# Altium PCB switch_control_two.PcbDoc
Units mil, origin at the board's own origin, x right, y up, seen from the top; angles counter-clockwise.
Board outline 4855 x 2900 mil, 2 copper layers (Top Layer, Bottom Layer); 15 components, 10 nets, 38 pads, 0 vias.
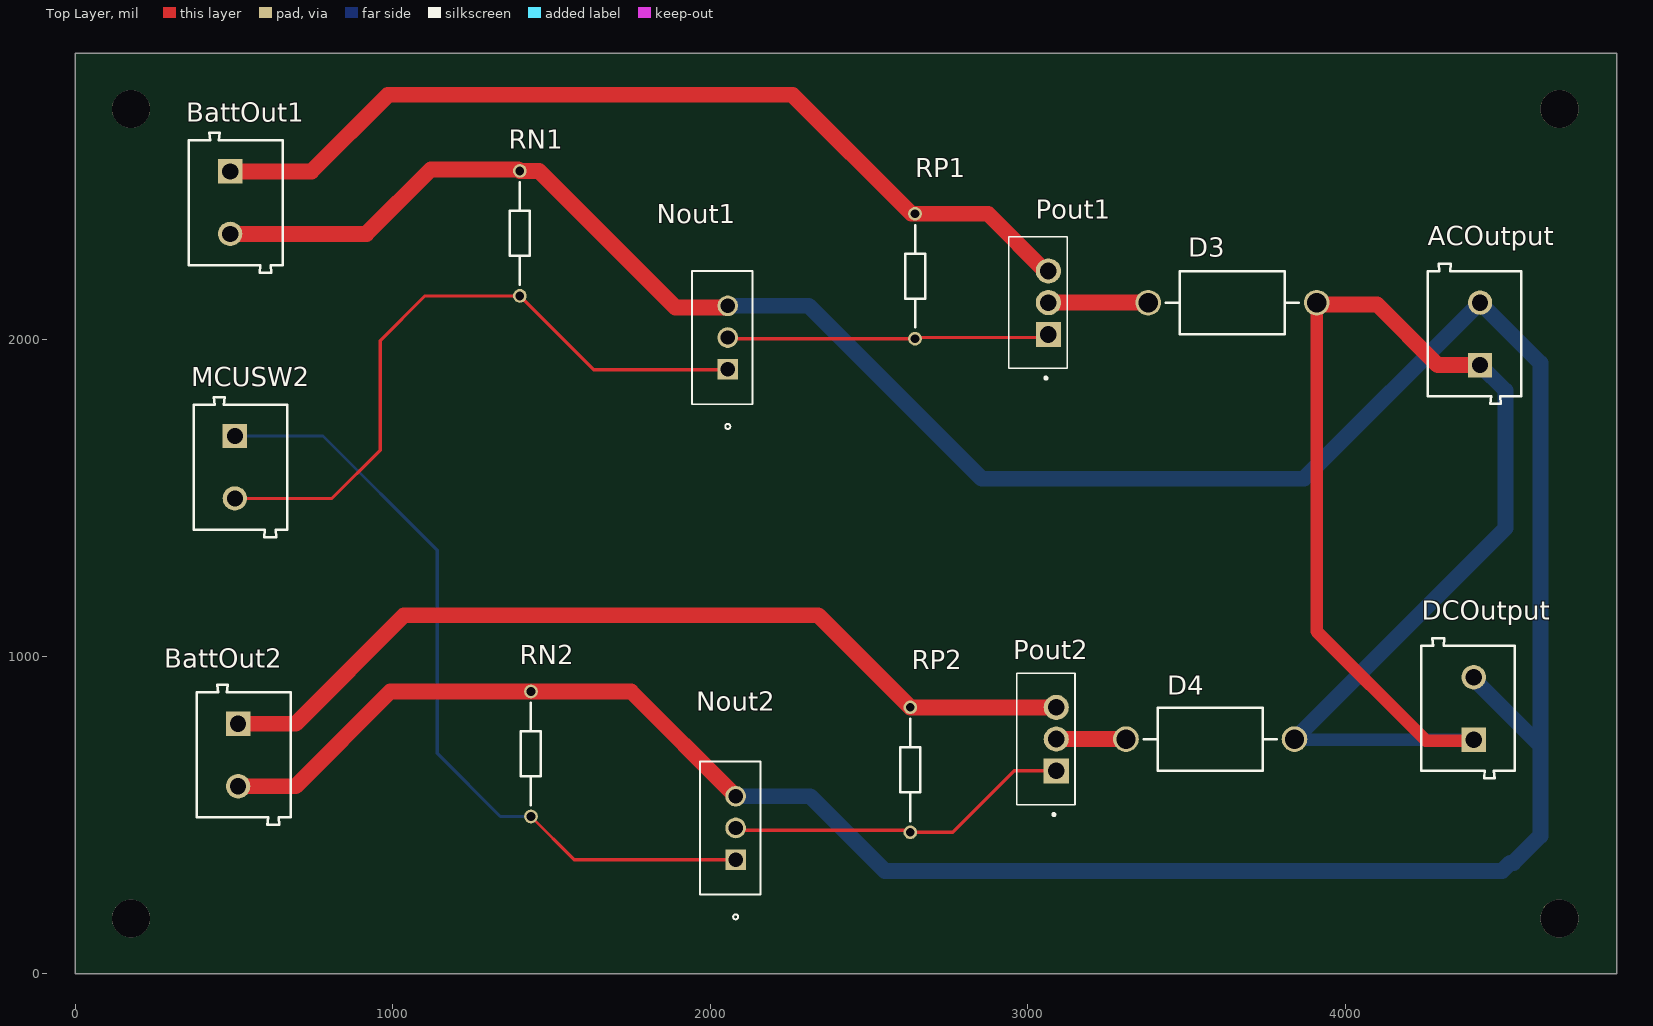
[diagram p0: Top Layer view]
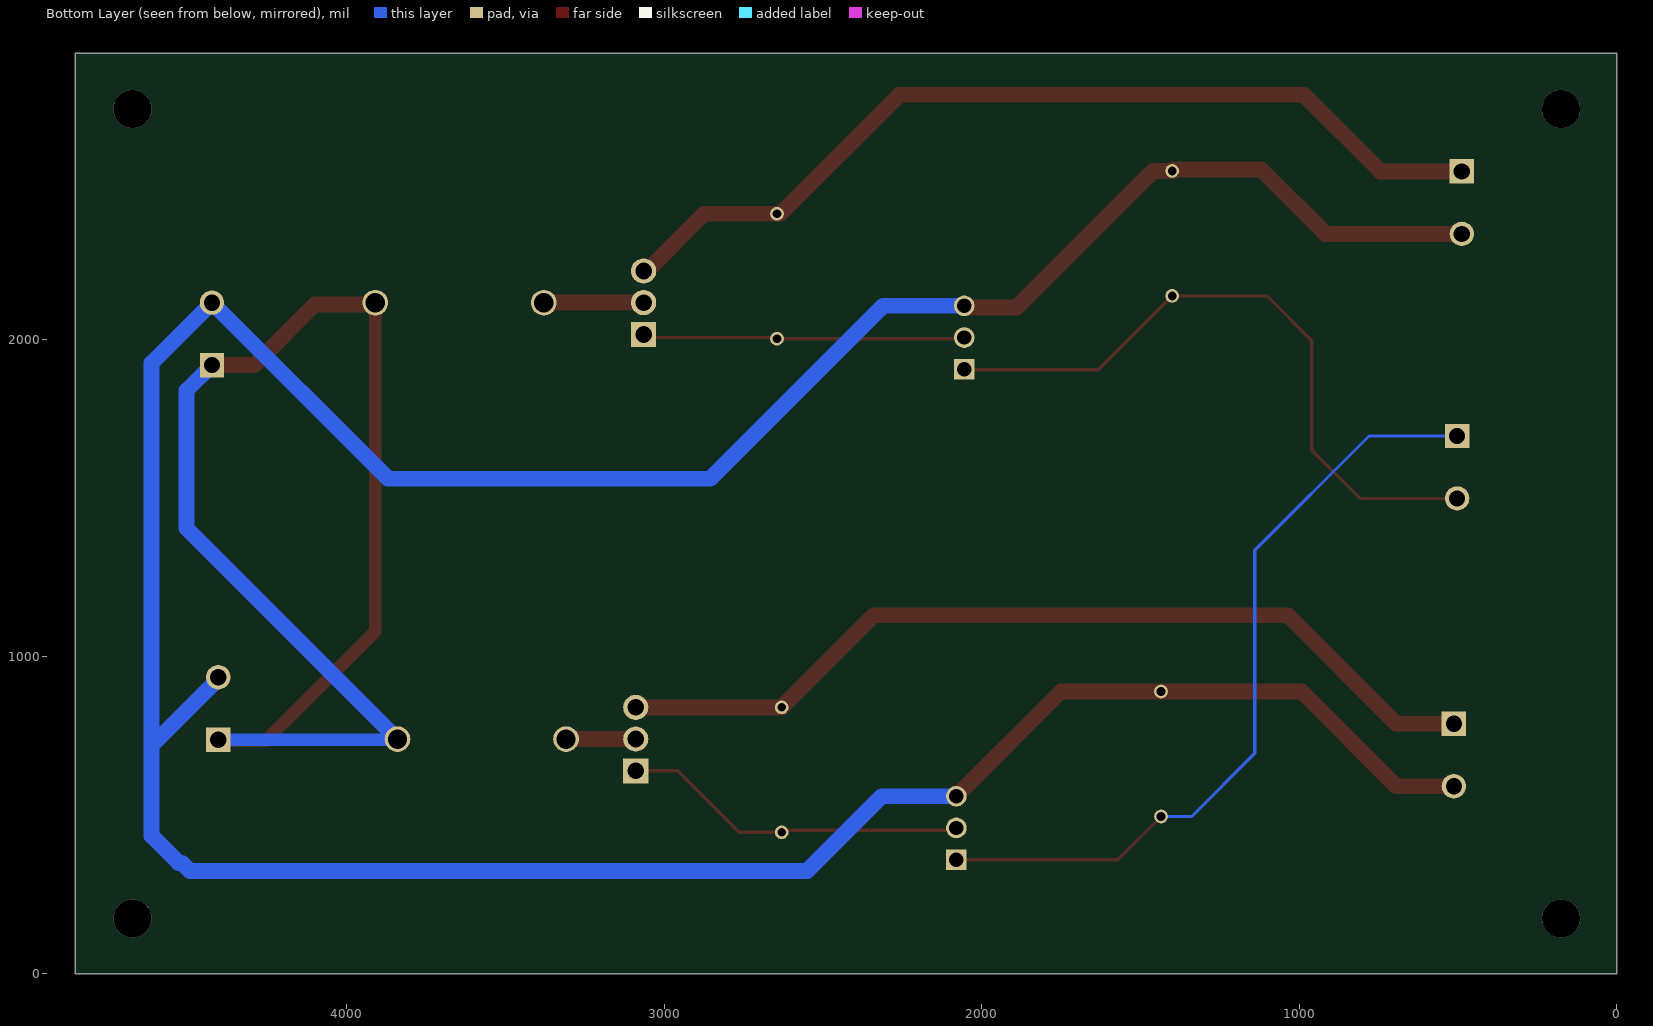
[diagram p1: Bottom Layer view, seen from below]

## Layer stack, top to bottom
Top Solder: solder mask 0.4, Solder Resist, Dk 3.5
Top Layer: signal copper 1.4
Dielectric 1: dielectric 12.6, FR-4, Dk 4.8
Bottom Layer: signal copper 1.4
Bottom Solder: solder mask 0.4, Solder Resist, Dk 3.5

## Board outline
0,0 0,2900 4855,2900 4855,0

## Design rules (kind name [scope] priority, off if disabled: settings)
Clearance [All] p1: gap=10 ignorepadtopadclearanceinfootprint=FALSE except(0: Arc-Hole Track-Hole SMDPad-Hole THPad-Hole Via-Hole Fill-Hole Poly-Hole Region-Hole Text-Hole)
HoleSize [All] p1: absolutevalues=TRUE maxlimit=130 minlimit=1 maxpercent=80.000 minpercent=20.000
PolygonConnect [All] p1: connectstyle=Relief reliefconductorwidth=10 reliefentries=4 polygonreliefangle="90 Angle" airgapwidth=10
RoutingVias [All] p1: holewidth=28 width=50 viastyle="Through Hole" minholewidth=28 minwidth=50 maxholewidth=28 maxwidth=50
SilkToSolderMaskClearance [IsPad] p1: minsilkscreentomaskgap=8 clearancetoexposedcopper=TRUE
SolderMaskExpansion [All] p1: expansion=4 istentingtop=FALSE
Width [All] p1: maxlimit=60 minlimit=10 preferedwidth=50
28 further rules are at their usual default settings.

## Components (designator, comment, footprint, x,y, rotation, side; value= is the part's Value field where it differs from the comment)
ACOutput "691102710002" 691102710002 4407.28,2016.57 r90 top
BattOut1 "691102710002" 691102710002 505,2430 r270 top
BattOut2 "691102710002" 691102710002 530,690 r270 top
D3 "1N5401" ONSC-AXIAL_LEAD-2-267-05_V 3645,2115 r180 top
D4 "1N5401" ONSC-AXIAL_LEAD-2-267-05_V 3575,740 r180 top
DCOutput "691102710002" 691102710002 4387.28,836.57 r90 top
MCUSW2 "691102710002" 691102710002 520,1596.57 r270 top
Nout1 "STP36NF06L" TO-220_STM 2055,1905 r90 top
Nout2 "STP36NF06L" TO-220_STM 2080,360 r90 top
Pout1 "IRF9540" TO254P1052X465X1989-3 3065,2015 r90 top
Pout2 "IRF9540" TO254P1052X465X1989-3 3090,640 r90 top
RN1 "MBA02040Z0000ZC100" RESAD1000W50L360D160 1400,2530 r270 top
RN2 "MBA02040Z0000ZC100" RESAD1000W50L360D160 1435,890 r270 top
RP1 "MBA02040Z0000ZC100" RESAD1000W50L360D160 2645,2395 r270 top
RP2 "MBA02040Z0000ZC100" RESAD1000W50L360D160 2630,840 r270 top

## Footprints (in the part's own frame and the unit in brackets; to place one, negate y for a bottom-side part, rotate by r counter-clockwise, add the part's x,y. Pads: shape width x height; smd on the part's side, far side on the other; paste and mask are expansions set on the pad)
691102710002 [mm] "5,00mm - modular - blue - Horizontal entry with pressure clamp - 9,9 mm height - 02p"
  rect 1.95x1.95 hole 1.3: 1(-2.5,-0.45)
  round 1.95 hole 1.3: 2(2.5,-0.45)
  silkscreen extent -5.6,-3.75 5.6,3.75, body extent -5.6,-3.75 5.6,3.75, height 9.96
ONSC-AXIAL_LEAD-2-267-05_V [mm] "AXIAL, 2-Leads, Diameter 5.05mm"
  round 2.05 hole 1.55: 1(-6.745,0) 2(6.745,0)
  silkscreen extent -5.32,-2.52 5.32,2.52
RESAD1000W50L360D160 [mm]
  round 1.1 hole 0.7: 1(0,0) 2(10,0)
  silkscreen extent 0.9,-0.8 9.1,0.8
TO254P1052X465X1989-3 [mm]
  rect 2.01x2.01 hole 1.34: 1(0,0)
  round 2.01 hole 1.34: 2(2.54,0) 3(5.08,0)
  silkscreen extent -3.6,-1.5 7.8,3.16
TO-220_STM [mil]
  rect 65x65 hole 45: 1(0,0)
  round 65 hole 45: 2(100,0) 3(200,0)
  silkscreen extent -188,-78 310,113, body extent -105,-74 305,108, height 776

## Part data
ACOutput BattOut1 BattOut2 DCOutput MCUSW2: library part CMP-1502-03258-1, "Series 102 - 5.00 mm Horizontal Entry Modular with Pressure Clamp WR-TBL, 2 pin", Manufacturer="Wurth Elektronik", Operating Temperature=-40to105degC, Datasheet URL=http://katalog.we-online.de/em/datasheet/6911027100xx.pdf, Manufacturer URL=http://www.we-online.de, Mounting Technology=THT, Package Reference=691102710002, Packaging=Box, Part Number=691102710002, Pin Number=2, Pitch=5.00mm, Publisher=WurthElektronik
D3 D4: library part CMP-0902-00078-1, "Standard Recovery Rectifier, 2-Pin Axial_Lead, Pb-Free, Bulk Box", Manufacturer="On Semiconductor", ComponentLink1Description="Manufacturer URL", ComponentLink1URL=http://www.onsemi.com/, ComponentLink2Description=Datasheet, ComponentLink2URL=http://www.onsemi.com/pub_link/Collateral/1N5400-D.PDF, ComponentLink3Description="Package Specification", ComponentLink3URL=http://www.onsemi.com/pub_link/Collateral/267-05.PDF, DatasheetVersion="Rev. 10", IFSM Max (A)=200, IO(rec) Max (A)=3, Mounting Technology="Through Hole", PackageDescription="2-Pin, Axial Lead, Diameter 5.05 mm", PackageReference=AXIAL_LEAD-2-267-05, PackageVersion="Rev. G, 06/2000", Packing="Bulk Box", PartNumber=1N5401, RoHS=TRUE, Type="Standard Recovery", VRRM Max (V)=100
Nout1 Nout2: "No Description Available", Mfr_Name=STMicroelectronics, Copyright="Copyright (C) 2022 Ultra Librarian. All rights reserved.", Digi-Key_Part_Number_1=497-7522-5-ND, Manufacturer_Part_Number=STP36NF06L, RefDes=RefDes, Type=DEV
Pout1 Pout2: "P-Channel 100V 19A (Tc) 150W (Tc) Through Hole TO-220AB", Package="TO-220 International Rectifier", Digi-Key_Part_Number=IRF9540PBF-ND, MF="Vishay Siliconix", MP=IRF9540, SnapEDA_Link=https://www.snapeda.com/parts/IRF9540/Vishay%20Siliconix/view-part/1087953/?ref=snap
RN1 RN2 RP1 RP2: "Resistor", Manufacturer_Name=Vishay, Datasheet Link=https://www.vishay.com/docs/28766/mbxsma.pdf, Manufacturer_Part_Number=MBA02040Z0000ZC100

## Free pads (board coordinates)
  round 120 hole 120: 6(4675,2725) 7(4675,175) 8(175,175) 9(175,2725)

## Nets (pads, with @x,y where several pads share a name; then routed paths per layer and width w, separated by ;. In a path a pad name is that pad's centre, name@x,y a point inside that pad or via, vN(x,y) a via of type N, cw(c..) or ccw(c..) an arc to the next point about the centre after c; other vN are vias at no path point)
GND2: ACOutput.2 BattOut1.2 BattOut2.2 DCOutput.2 Nout1.3 Nout2.3 RN1.1 RN2.1 | length 11205.2
  Top Layer w50: BattOut1.2@505,2331.57 916.57,2331.57 1120,2535 1395,2535 RN1.1 1460,2530 1890,2100 Nout1.3@2055,2100 ; BattOut2.2 693.43,591.57 991.85,890 RN2.1 1750,890 Nout2.3
  Bottom Layer w50: Nout1.3 2310,2105 2855,1560 3870,1560 ACOutput.2 4615,1925 4615,720 ; Nout2.3 2315,560 2550,325 4495,325 4520,350 4530,350 4615,435 4615,720 ; DCOutput.2@4402.5,932.5 4615,720
NetBattOut1_1: BattOut1.1 Pout1.3 RP1.1 | length 2894.1
  Top Layer w50: BattOut1.1@505,2528.43 743.43,2528.43 985,2770 2258.7,2770 2633.7,2395 2875,2395 Pout1.3@3065,2205
NetBattOut2_1: BattOut2.1 Pout2.3 RP2.1 | length 2839.3
  Top Layer w50: BattOut2.1 693.43,788.43 1035,1130 2340,1130 RP2.1 Pout2.3
NetD3_2: D3.2 Pout1.2 | length 314.4
  Top Layer w50: Pout1.2 D3.2
NetD4_2: D4.2 Pout2.2 | length 219.4
  Top Layer w50: Pout2.2 D4.2
NetMCUSW2_1: MCUSW2.1 Nout2.1 RN2.2 | length 2505.6
  Top Layer w10: RN2.2 1571.3,360 Nout2.1
  Bottom Layer w10: MCUSW2.1 780,1695 1140,1335 1140,695 1338.7,496.3 RN2.2
NetMCUSW2_2: MCUSW2.2 Nout1.1 RN1.2 | length 2116.1
  Top Layer w10: MCUSW2.2 808.15,1498.15 960,1650 960,1995 1101.3,2136.3 RN1.2 1632.73,1903.57 2053.57,1903.57 Nout1.1
NetNout1_2: Nout1.2 Pout1.1 RP1.2 | length 1013.1
  Top Layer w10: Nout1.2 2058.7,2001.3 RP1.2 2648.7,2005 Pout1.1@3065,2005
NetNout2_2: Nout2.2 Pout2.1 RP2.2 | length 1095.9
  Top Layer w10: Nout2.2 2087.33,452.67 2623.63,452.67 RP2.2 2763.7,446.3 2957.4,640 Pout2.1
Vout: ACOutput.1 D3.1 D4.1 DCOutput.1 | length 4324.2
  Top Layer w40: D3.1 3910.55,1079.45 4255,735 DCOutput.1@4405,735
  Top Layer w50: D3.1 3916.43,2109.12 4100.88,2109.12 4291.85,1918.15 ACOutput.1
  Bottom Layer w40: D4.1@3843.05,737.5 DCOutput.1@4405,737.5
  Bottom Layer w50: D4.1@3843.05,737.5 D4.1 4505,1404.45 4505,1838.15 ACOutput.1 ; DCOutput.1@4384.78,740.65 DCOutput.1@4387.28,738.15

## Silkscreen, mask and mechanical layers (free items; w line width, h text height)
Mechanical 1:
  the board outline again, w10
Board:
  the board outline again, w10